# Altium PCB PCB1.PcbDoc
Units mil, origin at the board's own origin, x right, y up, seen from the top; angles counter-clockwise.
Board outline 6000 x 4000 mil, 2 copper layers (Top Layer, Bottom Layer); 109 components, 201 nets, 610 pads, 0 vias.
Unrouted connection lines stored in the file: 389.
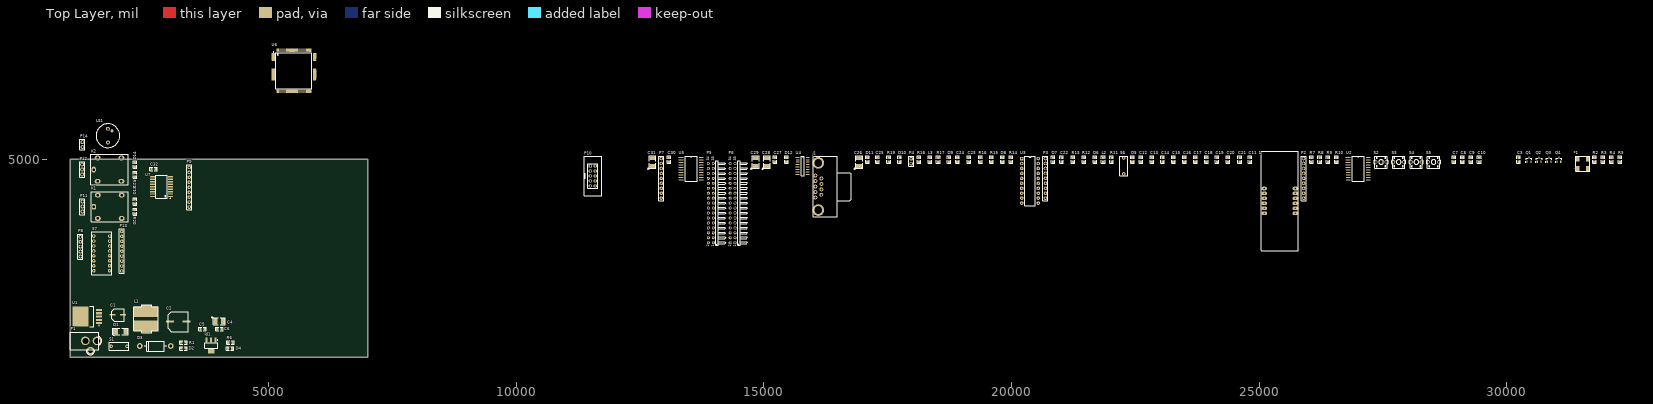
[diagram p0: Top Layer view]
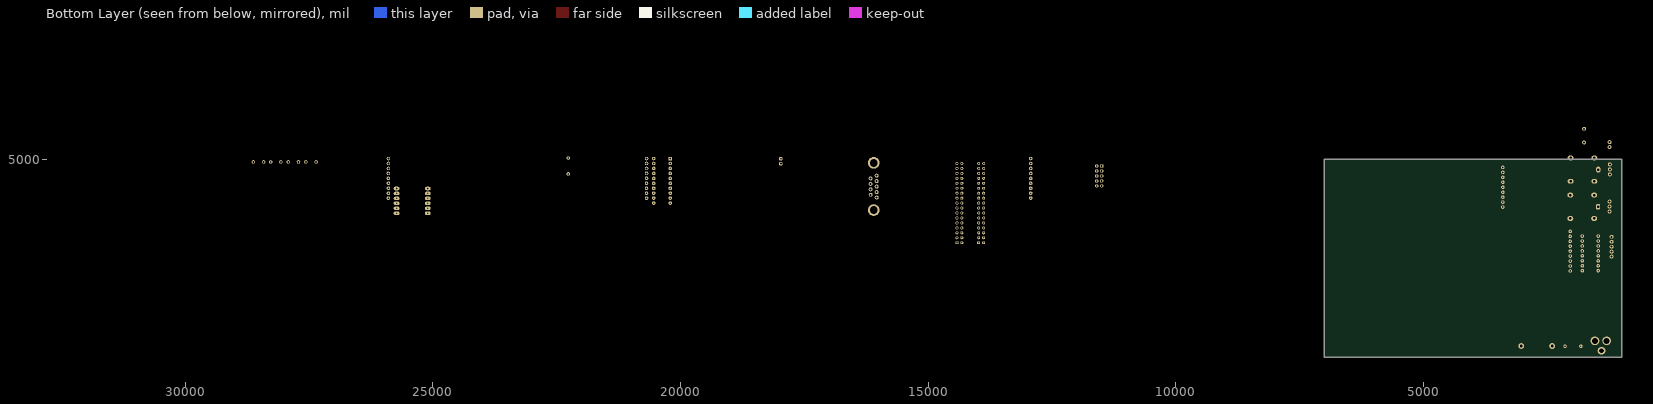
[diagram p1: Bottom Layer view, seen from below]

## Layer stack, top to bottom
Top Solder: solder mask 0.4, Solder Resist, Dk 3.5
Top Layer: signal copper 1.4
Dielectric 1: dielectric 12.6, FR-4, Dk 4.8
Bottom Layer: signal copper 1.4
Bottom Solder: solder mask 0.4, Solder Resist, Dk 3.5

## Board outline
1000,1000 7000,1000 7000,5000 1000,5000

## Design rules (kind name [scope] priority, off if disabled: settings)
Clearance [All] p1: gap=10
PolygonConnect [All] p1: connectstyle=Relief reliefconductorwidth=10 reliefentries=4 polygonreliefangle="90 Angle" airgapwidth=10
RoomDefinition Sheet1 [InComponentClass('Sheet1')] p1: confinementstyle=ConfineIn formatcopy=TRUE lockcomponents=FALSE outline 7045,1060 7985,1060 7985,2100 7045,2100
RoutingVias [All] p1: holewidth=28 width=50 viastyle="Through Hole" minholewidth=28 minwidth=50 maxholewidth=28 maxwidth=50
SolderMaskExpansion [All] p1: expansion=4
Width [All] p1: maxlimit=10 minlimit=10 preferedwidth=10
30 further rules are at their usual default settings.

## Components (designator, comment, footprint, x,y, rotation, side; value= is the part's Value field where it differs from the comment)
1 "7_SEG_MUX" s7_mux 25380,4155 r90 top
*1 "OSC_SMD" osc_smd 31390,4755 r0 top
C1 "Cap Pol1" C_CYL_SMD2 1965,1845 r180 top
C2 "Cap Pol1" C_CYL_SMD 3170,1720 r180 top
C3 "Cap" SMD_805 30235,4985 r0 top
C4 "Cap Pol1" C_B 4010,1725 r270 top
C5 "Cap" SMD_805 3670,1570 r270 top
C6 "Cap" SMD_805 4010,1565 r90 top
C7 "Cap" SMD_805 28930,4985 r0 top
C8 "Cap" SMD_805 29100,4985 r0 top
C9 "Cap" SMD_805 29270,4985 r0 top
C10 "Cap" SMD_805 29440,4985 r0 top
C11 "Cap" SMD_805 24815,4985 r0 top
C12 "Cap" SMD_805 22610,4985 r0 top
C13 "Cap" SMD_805 22830,4985 r0 top
C14 "Cap" SMD_805 23050,4985 r0 top
C15 "Cap" SMD_805 23270,4985 r0 top
C16 "Cap" SMD_805 23490,4985 r0 top
C17 "Cap" SMD_805 23710,4985 r0 top
C18 "Cap" SMD_805 23930,4985 r0 top
C19 "Cap" SMD_805 24150,4985 r0 top
C20 "Cap" SMD_805 24370,4985 r0 top
C21 "Cap" SMD_805 24605,4985 r0 top
C22 "Cap" SMD_805 21010,4985 r0 top
C23 "Cap" SMD_805 19140,4985 r0 top
C24 "Cap" SMD_805 18910,4985 r0 top
C25 "Cap" SMD_805 17290,4985 r0 top
C26 "Cap Pol1" c_b 16925,4940 r0 top
C27 "Cap" SMD_805 15225,4985 r0 top
C28 "Cap Pol1" c_b 15065,4940 r0 top
C29 "Cap Pol1" c_b 14835,4940 r0 top
C30 "Cap" SMD_805 13085,4985 r0 top
C31 "Cap Pol1" c_b 12755,4940 r0 top
C32 "Cap" SMD_805 2685,4795 r90 top
D1 "Diode 1N4007" TVS 2017,1521 r90 top
D2 "LED0" SMD_805 3285,1180 r270 top
D3 "Diode 1N5822" 1N5822 2390,1176 r0 top
D4 "LED0" SMD_805 4227,1176 r270 top
D5 "LED0" SMD_805 22440,4985 r0 top
D6 "LED0" SMD_805 21680,4985 r0 top
D7 "LED0" SMD_805 20840,4985 r0 top
D8 "LED0" SMD_805 19815,4985 r0 top
D9 "LED0" SMD_805 18740,4985 r0 top
D10 "LED0" SMD_805 17740,4985 r0 top
D11 "LED0" SMD_805 17090,4985 r0 top
D12 "LED0" SMD_805 15455,4985 r0 top
D13 "LED0" SMD_805 2306,4144 r180 top
D14 "LED0" SMD_805 2306,4886 r180 top
J1 "D Connector 9" com 16380,4355 r90 top
K1 "Relay" relay_5v 1775,4030 r0 top
K2 "Relay" relay_5v 1770,4780.28 r0 top
L1 "Inductor" INDUC_SMD 2520,1775 r90 top
L2 "Inductor" SMD_805 21850,4985 r0 top
L3 "Inductor" SMD_805 18350,4985 r0 top
ld1 "Component_1" SOT223 3845,1235 r180 top
LS1 "Speaker" buzzer 1760,5470 r270 top
P1 "Header 2" ADAP_JACK 1001.85,1152.83 r0 top
P2 "Array 10k" "aray 9" 25895,4735 r0 top
P3 "Array 1k" "Aray 9" 20685,4735 r0 top
P4 "ADC input" pin_2_w 17975,4955 r0 top
P5 "Header 17X2H" HDR2X17H 13980,3310 r90 top
P6 "Header 17X2H" HDR2X17H 14420,3310 r90 top
P7 "Array 10k" "aray 9" 12930,4735 r0 top
P8 "Header 5" pin_5_w 1205,3230 r180 top
P9 "Array 1k" "aray 9" 3400,4555 r0 top
P10 "Header 5X2" box2x5_3d 11550,4660 r90 top
P11 "Header 3" pin_3_w 1245,4040 r0 top
P12 "Header 3" pin_3_w 1240,4790 r0 top
P13 "Array 10k" "aray 9" 2040,3265 r0 top
P14 "Header 2" pin_2_w 1245,5290 r180 top
Q1 "BC817" sot23 30445,4980 r0 top
Q2 "BC817" sot23 30650,4980 r0 top
Q3 "BC817" sot23 30850,4980 r0 top
Q4 "BC817" sot23 31050,4980 r0 top
R1 "Res1" SMD_805 3285,1300 r270 top
R2 "Res1" SMD_805 31765,4985 r0 top
R3 "Res1" SMD_805 31935,4985 r0 top
R4 "Res1" SMD_805 32105,4985 r0 top
R5 "Res1" SMD_805 32280,4985 r0 top
R6 "Res1" SMD_805 4230,1295 r270 top
R7 "Res1" SMD_805 26050,4985 r0 top
R8 "Res1" SMD_805 26220,4985 r0 top
R9 "Res1" SMD_805 26390,4985 r0 top
R10 "Res1" SMD_805 26560,4985 r0 top
R11 "Res1" SMD_805 22020,4985 r0 top
R12 "Res1" SMD_805 21460,4985 r0 top
R13 "Res1" SMD_805 21240,4985 r0 top
R14 "Res1" SMD_805 19985,4985 r0 top
R15 "Res1" SMD_805 19595,4985 r0 top
R16 "Res1" SMD_805 19370,4985 r0 top
R17 "Res1" SMD_805 18520,4985 r0 top
R18 "Res1" SMD_805 18130,4985 r0 top
R19 "Res1" SMD_805 17520,4985 r0 top
R20 "Res1" SMD_805 2304,3935 r0 top
R21 "Res1" SMD_805 2304,4681 r0 top
S1 "SW-SPST" KEY1 1990,1220 r0 top
S2 "SW-PB" res_b 27460,4940 r0 top
S3 "SW-PB" res_b 27815,4940 r0 top
S4 "SW-PB" res_b 28170,4940 r0 top
S5 "SW-PB" res_b 28520,4940 r0 top
S6 "SW-SPST" key1 22265,4865 r90 top
S7 "SW DIP-8" array_key8 1620,3100 r180 top
U1 "LM2576HVT-5.0" LM2576_SMD 1225,1820 r90 top
U2 "M74HC541B1R" sop20 26795,5030 r0 top
U3 "ADC0804CN" DIp_20p 20205,5010 r0 top
U4 "MAX3232CPE" sop16 15680,5035 r0 top
U5 "M74HC541B1R" sop20 13330,5030 r0 top
U6 "XC95288XL-10TQG144C" TQG144_N 5515.35,6784.84 r0 top
U7 "ULN2803A" sol18 2840,4440 r180 top

## Footprints (in the part's own frame and the unit in brackets; to place one, negate y for a bottom-side part, rotate by r counter-clockwise, add the part's x,y. Pads: shape width x height; smd on the part's side, far side on the other; paste and mask are expansions set on the pad)
1N5822 [mm]
  round 3 hole 1.4: 1(16.205,1.27) 2(0.381,1.245)
  silkscreen extent 2.51,-1.4 14.05,3.81, body extent -0.13,-1.5 16.72,3.89, height 5.33
ADAP_JACK [mm]
  round 4.5 hole 3: 1(7.7,4.5) 2(13.7,4.5)
  round 4 hole 2.5: 1(10.3,-0.6)
  silkscreen extent 0,-2.68 16.04,9, body extent -0.1,-0.5 14.7,9, height 10
"aray 9" [mm]
  round 1.8 hole 0.9: 1(0,6.985) 2(0,4.445) 3(0,1.905) 4(0,-0.635) 5(0,-3.175) 6(0,-5.715) 7(0,-8.255) 8(0,-10.795) 9(0,-13.335)
  silkscreen extent -1.27,-14.6 1.27,8.25
"Aray 9" [mm]
  round 1.8 hole 0.9: 1(0,6.985) 2(0,4.445) 3(0,1.905) 4(0,-0.635) 5(0,-3.175) 6(0,-5.715) 7(0,-8.255) 8(0,-10.795) 9(0,-13.335)
  silkscreen extent -1.27,-14.6 1.27,8.25
array_key8 [mm]
  round 1.8 hole 0.9: 1(-4.445,9.017) 2(-4.445,6.477) 3(-4.445,3.937) 4(-4.445,1.397) 5(-4.445,-1.143) 6(-4.445,-3.683) 7(-4.445,-6.223) 8(-4.445,-8.763) 9(3.683,-8.763) 10(3.683,-6.223) 11(3.683,-3.683) 12(3.683,-1.143) 13(3.683,1.397) 14(3.683,3.937) 15(3.683,6.477) 16(3.683,9.017)
  silkscreen extent -5.46,-10.92 4.7,11.05
box2x5_3d [mm]
  rect 1.5x1.8 hole 1: 1(5.047,1.346)
  oval 1.5x1.8 hole 1: 2(5.047,-1.194) 3(2.507,1.346) 4(2.507,-1.194) 5(-0.033,1.346) 6(-0.033,-1.194) 7(-2.573,1.346) 8(-2.573,-1.194) 9(-5.113,1.346) 10(-5.113,-1.194)
  silkscreen extent -10.29,-4.45 10.03,4.57, body extent -10.41,-4.57 10.16,4.7, height 8
buzzer [mm]
  round 2 hole 1: 1(-3.556,0) 2(3.429,0)
  silkscreen extent -6.11,-6.1 6.1,6.1
C_B [mm]
  rect 3.1x2 smd: 1(-0.002,-2.041) 2(-0.002,1.896)
  silkscreen extent -2.67,-4.07 1.73,3.07, body extent -1.4,-1.78 1.4,1.78, height 2.23
c_b [mm]
  rect 3.1x2 smd: 1(-0.002,-2.041) 2(-0.002,1.896)
  silkscreen extent -2.67,-4.07 1.73,3.07, body extent -1.4,-1.78 1.4,1.78, height 2.23
C_CYL_SMD [mil]
  rect 157.48x39.37 smd: 1(159,3) 2(-174,3)
  silkscreen extent -210,-200 196,206, body extent -210,-200 196,206, height 394
C_CYL_SMD2 [mil]
  rect 118.11x31.5 smd: 1(109,-8) 2(-103,-8)
  silkscreen extent -125,-136 131,120, body extent -125,-136 131,120, height 197
com [mm]
  round 2 hole 1: 1(-3.35,8.65) 2(-0.55,8.65) 3(2.25,8.65) 4(5.05,8.65) 5(7.85,8.65) 6(-1.95,5.563) 7(0.85,5.563) 8(3.65,5.563) 9(6.45,5.563)
  round 6 hole 4: 10(14.4,7.125) 11(-9.794,7.125)
  silkscreen extent -13.18,-9.67 17.83,9.72
DIp_20p [mm]
  rect 1.8x1.8 hole 0.8: 1(0,0)
  round 1.8 hole 0.8: 2(0,-2.54) 3(0,-5.08) 4(0,-7.62) 5(0,-10.16) 6(0,-12.7) 7(0,-15.24) 8(0,-17.78) 9(0,-20.32) 10(0,-22.86) 11(8.5,-22.86) 12(8.5,-20.32) 13(8.5,-17.78) 14(8.5,-15.24) 15(8.5,-12.7) 16(8.5,-10.16) 17(8.5,-7.62) 18(8.5,-5.08) 19(8.5,-2.54) 20(8.5,0)
  silkscreen extent 1.63,-24.26 6.87,1.27
HDR2X17H [mm] "Connector; Header; 17x2 Position; Right Angle"
  rect 1.5x1.5 hole 0.9: 1(0,0)
  round 1.5 hole 0.9: 2(0,2.54) 3(2.54,0) 4(2.54,2.54) 5(5.08,0) 6(5.08,2.54) 7(7.62,0) 8(7.62,2.54) 9(10.16,0) 10(10.16,2.54) 11(12.7,0) 12(12.7,2.54) 13(15.24,0) 14(15.24,2.54) 15(17.78,0) 16(17.78,2.54) 17(20.32,0) 18(20.32,2.54) 19(22.86,0) 20(22.86,2.54) 21(25.4,0) 22(25.4,2.54) 23(27.94,0) 24(27.94,2.54) 25(30.48,0) 26(30.48,2.54) 27(33.02,0) 28(33.02,2.54) 29(35.56,0) 30(35.56,2.54) 31(38.1,0) 32(38.1,2.54) 33(40.64,0) 34(40.64,2.54)
  silkscreen extent -1.27,-6.35 41.91,-1.27
INDUC_SMD [mil]
  rect 78.74x196.85 smd: 1(-240,-20) 2(240,-20)
  rect 208.66x488.19 smd: 1(-140,-10) 2(140,-10)
  silkscreen extent -285,-255 285,235
KEY1 [mm]
  round 1.8 hole 0.9: 1(-4.191,0) 2(3.937,0)
  silkscreen extent -5.21,-2.03 4.95,2.03
key1 [mm]
  round 1.8 hole 0.9: 1(-4.191,0) 2(3.937,0)
  silkscreen extent -5.21,-2.03 4.95,2.03
LM2576_SMD [mm]
  rect 1.05x3.2 smd: 1(-3.4,-9.048) 2(-1.7,-9.048) 3(0,-9.048) 4(1.7,-9.048) 5(3.4,-9.048)
  rect 10.45x8.3 smd: 6(0,0.402)
  silkscreen extent -5.2,-9.17 5.2,-4.15, body extent -5.2,-6.4 5.2,3, height 4.65
osc_smd [mm]
  rect 1.8x2.5 smd: 1(1.067,1.404) 2(6.147,1.404) 3(6.147,6.324) 4(1.067,6.324)
  silkscreen extent 0,0 7.2,7.75, body extent 0,1.3 7.2,6.5, height 1.7
pin_2_w [mm]
  round 2 hole 1: 1(0,1.27) 2(0,-1.27)
  silkscreen extent -1.27,-2.67 1.27,2.67
pin_3_w [mm]
  round 2 hole 1: 1(0,2.54) 2(0,0) 3(0,-2.54)
  silkscreen extent -1.27,-4.06 1.27,3.94
pin_5_w [mm]
  round 2 hole 1: 1(0,5.08) 2(0,2.54) 3(0,0) 4(0,-2.54) 5(0,-5.08)
  silkscreen extent -1.27,-6.48 1.27,6.48
relay_5v [mm]
  oval 2.2x3 hole 1.3: 1(-7.533,0.151)
  oval 3x2.5 hole 1.3: 2(6.667,6.151) 3(6.667,-5.849) 4(-5.533,-5.849) 5(-5.533,6.151)
  silkscreen extent -9.02,-7.65 10.08,7.95, body extent -8.92,-7.62 10.18,7.88, height 15.3
res_b [mm]
  round 1.8 hole 1: 1(-2.667,0) 2(2.54,0)
  silkscreen extent -3.82,-3.17 3.69,3.05, body extent -3.17,-3.17 3.05,3.05, height 4
s7_mux [mm]
  oval 1.8x3 hole 0.8: 1(-6.35,7.112) 2(-3.81,7.112) 3(-1.27,7.112) 4(1.27,7.112) 5(3.81,7.112) 6(6.35,7.112) 7(-6.35,-8.89) 8(-3.81,-8.89) 9(-1.27,-8.89) 10(1.27,-8.89) 11(3.81,-8.89) 12(6.35,-8.89)
  silkscreen extent -25.53,-10.41 25.53,8.64
SMD_805 [mil]
  rect 55.12x47.24 smd: 1(1,44) 2(1,-42)
  silkscreen extent -35,-74 37,76, body extent -26,-42 28,45, height 43
sol18 [mm]
  rect 2.5x0.6 smd: 1(-4.652,5.055) 2(-4.652,3.785) 3(-4.652,2.515) 4(-4.652,1.245) 5(-4.652,-0.025) 6(-4.652,-1.295) 7(-4.652,-2.565) 8(-4.652,-3.835) 9(-4.652,-5.105) 10(4.652,-5.105) 11(4.652,-3.835) 12(4.652,-2.565) 13(4.652,-1.295) 14(4.652,-0.025) 15(4.652,1.245) 16(4.652,2.515) 17(4.652,3.785) 18(4.652,5.055)
  silkscreen extent -4.67,-5.93 3,6.03, body extent -3.8,-5.98 3.8,5.92, height 2.65
sop16 [mm]
  rect 2x0.5 smd: 1(0,0)
  oval 2x0.5 smd: 2(0,-1.27) 3(0,-2.54) 4(0,-3.81) 5(0,-5.08) 6(0,-6.35) 7(0,-7.62) 8(0,-8.89) 9(5.2,-8.89) 10(5.2,-7.62) 11(5.2,-6.35) 12(5.2,-5.08) 13(5.2,-3.81) 14(5.2,-2.54) 15(5.2,-1.27) 16(5.2,0)
  silkscreen extent 1.84,-9.53 3.36,0.64
sop20 [mm]
  rect 2.5x0.5 smd: 1(0,0)
  oval 2.5x0.5 smd: 2(0,-1.27) 3(0,-2.54) 4(0,-3.81) 5(0,-5.08) 6(0,-6.35) 7(0,-7.62) 8(0,-8.89) 9(0,-10.16) 10(0,-11.43) 11(10.3,-11.43) 12(10.3,-10.16) 13(10.3,-8.89) 14(10.3,-7.62) 15(10.3,-6.35) 16(10.3,-5.08) 17(10.3,-3.81) 18(10.3,-2.54) 19(10.3,-1.27) 20(10.3,0)
  silkscreen extent 2.08,-12.06 8.22,0.64, body extent 1.27,-12.06 9.02,0.76, height 1.6
sot23 [mm]
  rect 0.6x1.3 smd: 1(-0.95,-0.923) 2(0.95,-0.923) 3(0,1.177)
  silkscreen extent -1.92,-1.05 1.5,0.83, body extent -1.5,-0.57 1.5,0.83, height 1.1
SOT223 [mm]
  rect 1x2.4 smd: 1(-2.269,-2.85) 2(0.031,-2.85) 3(2.331,-2.85)
  rect 3.3x2.4 smd: 2(0.031,2.95)
  silkscreen extent -3.44,-2.97 3.38,1.45, body extent -3.21,-3.44 3.27,3.54, height 1.64
TQG144_N [mm] "Thin QFP, 144-Leads, Body 20x20mm, Pitch 0.5mm, IPC Medium Density"
  oval 1.8x0.3 smd: 1(-10.55,8.75) 2(-10.55,8.25) 3(-10.55,7.75) 4(-10.55,7.25) 5(-10.55,6.75) 6(-10.55,6.25) 7(-10.55,5.75) 8(-10.55,5.25) 9(-10.55,4.75) 10(-10.55,4.25) 11(-10.55,3.75) 12(-10.55,3.25) 13(-10.55,2.75) 14(-10.55,2.25) 15(-10.55,1.75) 16(-10.55,1.25) 17(-10.55,0.75) 18(-10.55,0.25) 19(-10.55,-0.25) 20(-10.55,-0.75) 21(-10.55,-1.25) 22(-10.55,-1.75) 23(-10.55,-2.25) 24(-10.55,-2.75) 25(-10.55,-3.25) 26(-10.55,-3.75) 27(-10.55,-4.25) 28(-10.55,-4.75) 29(-10.55,-5.25) 30(-10.55,-5.75) 31(-10.55,-6.25) 32(-10.55,-6.75) 33(-10.55,-7.25) 34(-10.55,-7.75) 35(-10.55,-8.25) 36(-10.55,-8.75) 73(10.55,-8.75) 74(10.55,-8.25) 75(10.55,-7.75) 76(10.55,-7.25) 77(10.55,-6.75) 78(10.55,-6.25) 79(10.55,-5.75) 80(10.55,-5.25) 81(10.55,-4.75) 82(10.55,-4.25) 83(10.55,-3.75) 84(10.55,-3.25) 85(10.55,-2.75) 86(10.55,-2.25) 87(10.55,-1.75) 88(10.55,-1.25) 89(10.55,-0.75) 90(10.55,-0.25) 91(10.55,0.25) 92(10.55,0.75) 93(10.55,1.25) 94(10.55,1.75) 95(10.55,2.25) 96(10.55,2.75) 97(10.55,3.25) 98(10.55,3.75) 99(10.55,4.25) 100(10.55,4.75) 101(10.55,5.25) 102(10.55,5.75) 103(10.55,6.25) 104(10.55,6.75) 105(10.55,7.25) 106(10.55,7.75) 107(10.55,8.25) 108(10.55,8.75)
  oval 0.3x1.8 smd: 37(-8.75,-10.55) 38(-8.25,-10.55) 39(-7.75,-10.55) 40(-7.25,-10.55) 41(-6.75,-10.55) 42(-6.25,-10.55) 43(-5.75,-10.55) 44(-5.25,-10.55) 45(-4.75,-10.55) 46(-4.25,-10.55) 47(-3.75,-10.55) 48(-3.25,-10.55) 49(-2.75,-10.55) 50(-2.25,-10.55) 51(-1.75,-10.55) 52(-1.25,-10.55) 53(-0.75,-10.55) 54(-0.25,-10.55) 55(0.25,-10.55) 56(0.75,-10.55) 57(1.25,-10.55) 58(1.75,-10.55) 59(2.25,-10.55) 60(2.75,-10.55) 61(3.25,-10.55) 62(3.75,-10.55) 63(4.25,-10.55) 64(4.75,-10.55) 65(5.25,-10.55) 66(5.75,-10.55) 67(6.25,-10.55) 68(6.75,-10.55) 69(7.25,-10.55) 70(7.75,-10.55) 71(8.25,-10.55) 72(8.75,-10.55) 109(8.75,10.55) 110(8.25,10.55) 111(7.75,10.55) 112(7.25,10.55) 113(6.75,10.55) 114(6.25,10.55) 115(5.75,10.55) 116(5.25,10.55) 117(4.75,10.55) 118(4.25,10.55) 119(3.75,10.55) 120(3.25,10.55) 121(2.75,10.55) 122(2.25,10.55) 123(1.75,10.55) 124(1.25,10.55) 125(0.75,10.55) 126(0.25,10.55) 127(-0.25,10.55) 128(-0.75,10.55) 129(-1.25,10.55) 130(-1.75,10.55) 131(-2.25,10.55) 132(-2.75,10.55) 133(-3.25,10.55) 134(-3.75,10.55) 135(-4.25,10.55) 136(-4.75,10.55) 137(-5.25,10.55) 138(-5.75,10.55) 139(-6.25,10.55) 140(-6.75,10.55) 141(-7.25,10.55) 142(-7.75,10.55) 143(-8.25,10.55) 144(-8.75,10.55)
  silkscreen extent -10.67,-9.25 9.25,9.57, body extent -10,-10 10,10, height 1.6
TVS [mil]
  rect 122.05x98.43 smd: 1(-1,-103) 2(-1,102)
  silkscreen extent -82,-157 65,156, body extent -59,-108 56,108, height 88

## Part data
1 *1: library part Component_1
C1 C2 C4 C26 C28 C29 C31: "Polarized Capacitor (Radial)"
C3 C5 C6 C7 C8 C9 C10 C11 C12 C13 C14 C15 C16 C17 C18 C19 C20 C21 C22 C23 C24 C25 C27 C30 C32: "Capacitor"
D1: "1 Amp General Purpose Rectifier"
D2 D4 D5 D6 D7 D8 D9 D10 D11 D12 D13 D14: "Typical INFRARED GaAs LED"
D3: library part "Diode 1N4007", "1 Amp General Purpose Rectifier"
J1: "Receptacle Assembly, 9 Position, Right Angle"
K1 K2: "SPDT Relay"
LS1: "Loudspeaker"
P1 P14: "Header, 2-Pin"
P2 P3 P7 P9 P13: library part "Header 9H", "Header, 9-Pin, Right Angle"
P4: library part "Header 2", "Header, 2-Pin"
P5 P6: "Header, 17-Pin, Dual row, Right Angle"
P8: "Header, 5-Pin"
P10: "Header, 5-Pin, Dual row"
P11 P12: "Header, 3-Pin"
Q1 Q2 Q3 Q4: library part 2N3904, "NPN General Purpose Amplifier"
R1 R2 R3 R4 R5 R6 R7 R8 R9 R10 R11 R12 R13 R14 R15 R16 R17 R18 R19 R20 R21: "Resistor"
S1 S6: "Single-Pole, Single-Throw Switch"
S2 S3 S4 S5: "Switch"
S7: "DIP Switch, 8 Position, SPST"
U1: "SIMPLE SWITCHER; 3A Step-Down Voltage Regulator"
U2 U5: "Octal Bus Buffer with 3 State Outputs (Non Inverted)"
U3: "8-Bit Analog-to-Digital Converter with Differential Inputs"
U4: "3.0V TO 5.5V, Low-Power, up to 1Mbps, True RS-232 Transceiver Using Four 0.1µF External Capacitor"
U6: "FastFLASH XC900XL, 3.3V High-Performance CPLD with 288 Macrocells, 144-Pin TQFP, Commercial Grade, Pb-Free"
U7: "High-Voltage, High-Current Darlington Array"

## Nets (pads, with @x,y where several pads share a name; then routed paths per layer and width w, separated by ;. In a path a pad name is that pad's centre, name@x,y a point inside that pad or via, vN(x,y) a via of type N, cw(c..) or ccw(c..) an arc to the next point about the centre after c; other vN are vias at no path point)
3V3: *1.4 C3.1 C4.1 C6.1 C7.2 C8.2 C9.2 C10.2 C12.1 C13.1 C14.1 C15.1 C16.1 C17.1 C18.1 C19.1 C20.1 C21.1 C27.2 ld1.2 P5.33 P10.4 R6.2 S2.2 S3.2 S4.2 S5.2 S7.9 S7.10 S7.11 S7.12 S7.13 S7.14 S7.15 S7.16 U4.16 U6.1 U6.8 U6.37 U6.42 U6.55 U6.73 U6.84 U6.109 U6.127 U6.141
5V0: C2.1 C5.1 C11.1 C30.1 C32.1 K1.4 K2.4 L1.2 ld1.3 LS1.1 P8.5 P14.1 R1.2 R20.2 R21.2 U1.4 U2.20 U5.20 U7.10
.: 1.9 U2.11
._BUF: P2.2 U2.9 U6.34
A: 1.2 U2.18
A_BUF: P2.9 U2.2 U6.44
A_R: S6.2 U3.3 U3.5 U6.59
AD1: R11.1 U6.50
AD2: R12.1 U6.51
AD3: R13.1 U6.52
AD4: R14.1 U6.53
AD5: R16.1 U6.54
AD6: R17.1 U6.56
AD7: R18.1 U6.57
AD8: R19.1 U6.58
B: 1.6 U2.17
B_BUF: P2.8 U2.3 U6.43
BUT_RISE1: U6.45
BUT_RISE2: C8.1 R8.1 S3.1 U6.46
BUT_RISE3: C9.1 R9.1 S4.1 U6.48
BUT_RISE4: C10.1 R10.1 S5.1 U6.49
BUZ: P9.3 U6.3 U7.7
C: 1.10 U2.16
C_BUF: P2.7 U2.4 U6.41
D: 1.8 U2.15
D0: D5.1 U5.18
D1: D6.1 U5.17
D2: D7.1 U5.16
D3: D8.1 U5.15
D4: D9.1 U5.14
D5: D10.1 U5.13
D6: D11.1 U5.12
D7: D12.1 U5.11
D_BUF: P2.6 U2.5 U6.40
DX_1: P7.9 U5.2 U6.27
DX_2: P7.8 U5.3 U6.26
DX_3: P7.7 U5.4 U6.25
DX_4: P7.6 U5.5 U6.24
DX_5: P7.5 U5.6 U6.23
DX_6: P7.4 U5.7 U6.22
DX_7: P7.3 U5.8 U6.21
DX_8: P7.2 U5.9 U6.20
E: 1.7 U2.14
E_BUF: P2.5 U2.6 U6.39
F: 1.3 U2.13
F_BUF: P2.4 U2.7 U6.38
G: 1.11 U2.12
G_BUF: P2.3 U2.8 U6.35
GCLK0: *1.3 U6.30
GND: *1.2 C1.2 C2.2 C3.2 C4.2 C5.2 C6.2 C11.2 C12.2 C13.2 C14.2 C15.2 C16.2 C17.2 C18.2 C19.2 C20.2 C21.2 C22.2 C23.2 C24.2 C25.2 C27.1 C28.2 C30.2 C31.1 C32.2 D2.2 D3.1 D4.2 J1.5 L3.2 ld1.1 P1.1 P2.1 P3.9 P4.2 P5.34 P6.34 P7.1 P9.1 P10.2 P10.10 P13.1 Q1.2 Q2.2 Q3.2 Q4.2 R7.2 R8.2 R9.2 R10.2 S6.1 U1.3 U1.5 U2.1 U2.10 U2.19 U3.1 U3.2 U3.7 U3.10 U4.15 U5.1 U5.10 U5.19 U6.18 U6.29 U6.36 U6.47 U6.62 U6.72 U6.89 U6.90 U6.99 U6.108 U6.114 U6.123 U6.144 U7.9
K1: P13.9 S7.1 U6.19
K2: P13.8 S7.2 U6.17
K3: P13.7 S7.3 U6.16
K4: P13.6 S7.4 U6.15
K5: P13.5 S7.5 U6.14
K6: P13.4 S7.6 U6.13
K7: P13.3 S7.7 U6.12
K8: P13.2 S7.8 U6.11
MOTOR_1: P9.2 U6.2 U7.8
NetC1_1: C1.1 D1.2 U1.1
NetC7_1: C7.1 R7.1 S2.1
NetC22_1: C22.1 L2.1 U3.20
NetC23_1: C23.1 R15.2 U3.4
NetC24_1: C24.1 U3.9
NetC25_1: C25.1 P4.1 U3.6
NetC26_1: C26.1 U4.1
NetC26_2: C26.2 U4.3
NetC28_1: C28.1 U4.2
NetC29_1: C29.1 U4.4
NetC29_2: C29.2 U4.5
NetC31_2: C31.2 U4.6
NetD1_1: D1.1 S1.2
NetD2_1: D2.1 R1.1
NetD3_2: D3.2 L1.1 U1.2
NetD4_1: D4.1 R6.1
NetD5_2: D5.2 P3.8
NetD6_2: D6.2 P3.7
NetD7_2: D7.2 P3.6
NetD8_2: D8.2 P3.5
NetD9_2: D9.2 P3.4
NetD10_2: D10.2 P3.3
NetD11_2: D11.2 P3.2
NetD12_2: D12.2 P3.1
NetD13_1: D13.1 R20.1
NetD13_2: D13.2 K1.5 U7.14
NetD14_1: D14.1 R21.1
NetD14_2: D14.2 K2.5 U7.13
NetJ1_2: J1.2 U4.13
NetJ1_3: J1.3 U4.14
NetK1_1: K1.1 P11.2
NetK1_2: K1.2 P11.1
NetK1_3: K1.3 P11.3
NetK2_1: K2.1 P12.2
NetK2_2: K2.2 P12.1
NetK2_3: K2.3 P12.3
NetL3_1: L3.1 U3.8
NetLS1_2: LS1.2 U7.12
NetP1_2: P1.2 S1.1
NetP8_1: P8.1 U7.18
NetP8_2: P8.2 U7.17
NetP8_3: P8.3 U7.16
NetP8_4: P8.4 U7.15
NetP14_2: P14.2 U7.11
NetQ1_1: Q1.1 R2.1
NetQ2_1: Q2.1 R3.1
NetQ3_1: Q3.1 R4.1
NetQ4_1: Q4.1 R5.1
NetR11_2: R11.2 U3.18
NetR12_2: R12.2 U3.17
NetR13_2: R13.2 U3.16
NetR14_2: R14.2 U3.15
NetR15_1: R15.1 U3.19
NetR16_2: R16.2 U3.14
NetR17_2: R17.2 U3.13
NetR18_2: R18.2 U3.12
NetR19_2: R19.2 U3.11
P_1: P5.1 U6.64
P_2: P5.2 U6.66
P_3: P5.3 U6.68
P_4: P5.4 U6.69
P_5: P5.5 U6.70
P_6: P5.6 U6.71
P_7: P5.7 U6.74
P_8: P5.8 U6.75
P_9: P5.9 U6.76
P_10: P5.10 U6.77
P_11: P5.11 U6.78
P_12: P5.12 U6.79
P_13: P5.13 U6.80
P_14: P5.14 U6.81
P_15: P5.15 U6.82
P_16: P5.16 U6.83
P_17: P5.17 U6.85
P_18: P5.18 U6.86
P_19: P5.19 U6.87
P_20: P5.20 U6.88
P_21: P5.21 U6.91
P_22: P5.22 U6.92
P_23: P5.23 U6.93
P_24: P5.24 U6.94
P_25: P5.25 U6.95
P_26: P5.26 U6.96
P_27: P5.27 U6.97
P_28: P5.28 U6.98
P_29: P5.29 U6.100
P_30: P5.30 U6.101
P_31: P5.31 U6.102
P_32: P5.32 U6.103
P_33: P6.1 U6.104
P_34: P6.2 U6.105
P_35: P6.3 U6.106
P_36: P6.4 U6.107
P_37: P6.5 U6.110
P_38: P6.6 U6.111
P_39: P6.7 U6.112
P_40: P6.8 U6.113
P_41: P6.9 U6.115
P_42: P6.10 U6.116
P_43: P6.11 U6.117
P_44: P6.12 U6.118
P_45: P6.13 U6.119
P_46: P6.14 U6.120
P_47: P6.15 U6.121
P_48: P6.16 U6.124
P_49: P6.17 U6.125
P_50: P6.18 U6.126
P_51: P6.19 U6.128
P_52: P6.20 U6.129
P_53: P6.21 U6.130
P_54: P6.22 U6.131
P_55: P6.23 U6.132
P_56: P6.24 U6.133
P_57: P6.25 U6.134
P_58: P6.26 U6.135
P_59: P6.27 U6.136
P_60: P6.28 U6.137
P_61: P6.29 U6.138
P_62: P6.30 U6.139
P_63: P6.31 U6.140
P_64: P6.32 U6.142
P_65: P6.33 U6.143
REL_1: P9.5 U6.5 U7.5
REL_2: P9.4 U6.4 U7.6
RX1: U4.12 U6.61
S1: 1.12 Q1.3
S2: 1.5 Q2.3
S3: 1.4 Q3.3
S4: 1.1 Q4.3
SO1: R2.2 U6.28
SO2: R3.2 U6.31
SO3: R4.2 U6.32
SO4: R5.2 U6.33
STEP_1: P9.9 U6.10 U7.1
STEP_2: P9.8 U6.9 U7.2
STEP_3: P9.7 U6.7 U7.3
STEP_4: P9.6 U6.6 U7.4
TCK: P10.1 U6.67
TDI: P10.9 U6.63
TDO: P10.3 U6.122
TMS: P10.5 U6.65
TX1: U4.11 U6.60
pads on no net: *1.1 J1.1 J1.4 J1.6 J1.7 J1.8 J1.9 J1.10 J1.11 L2.2 P10.6 P10.7 P10.8 U1.6 U4.7 U4.8 U4.9 U4.10

## Text inside footprints (layer, text, board x,y; h text height)
P5: Top Overlay "2" at 13900,3230 h50 r90; Top Overlay "1" at 14000,3230 h50 r90; Top Overlay "33" at 14000,4970 h50 r90; Top Overlay "34" at 13900,4970 h50 r90
P6: Top Overlay "2" at 14340,3230 h50 r90; Top Overlay "1" at 14440,3230 h50 r90; Top Overlay "33" at 14440,4970 h50 r90; Top Overlay "34" at 14340,4970 h50 r90